# Altium PCB Underwater_ROV_Aux.PcbDoc (part 2 of 2)
Units mm, origin at the board's own origin, x right, y up, seen from the top; angles counter-clockwise.
Board outline 100 x 100 mm, 2 copper layers (Top Layer, Bottom Layer); 61 components, 140 nets, 560 pads, 86 vias.
Unrouted connection lines stored in the file: 2.
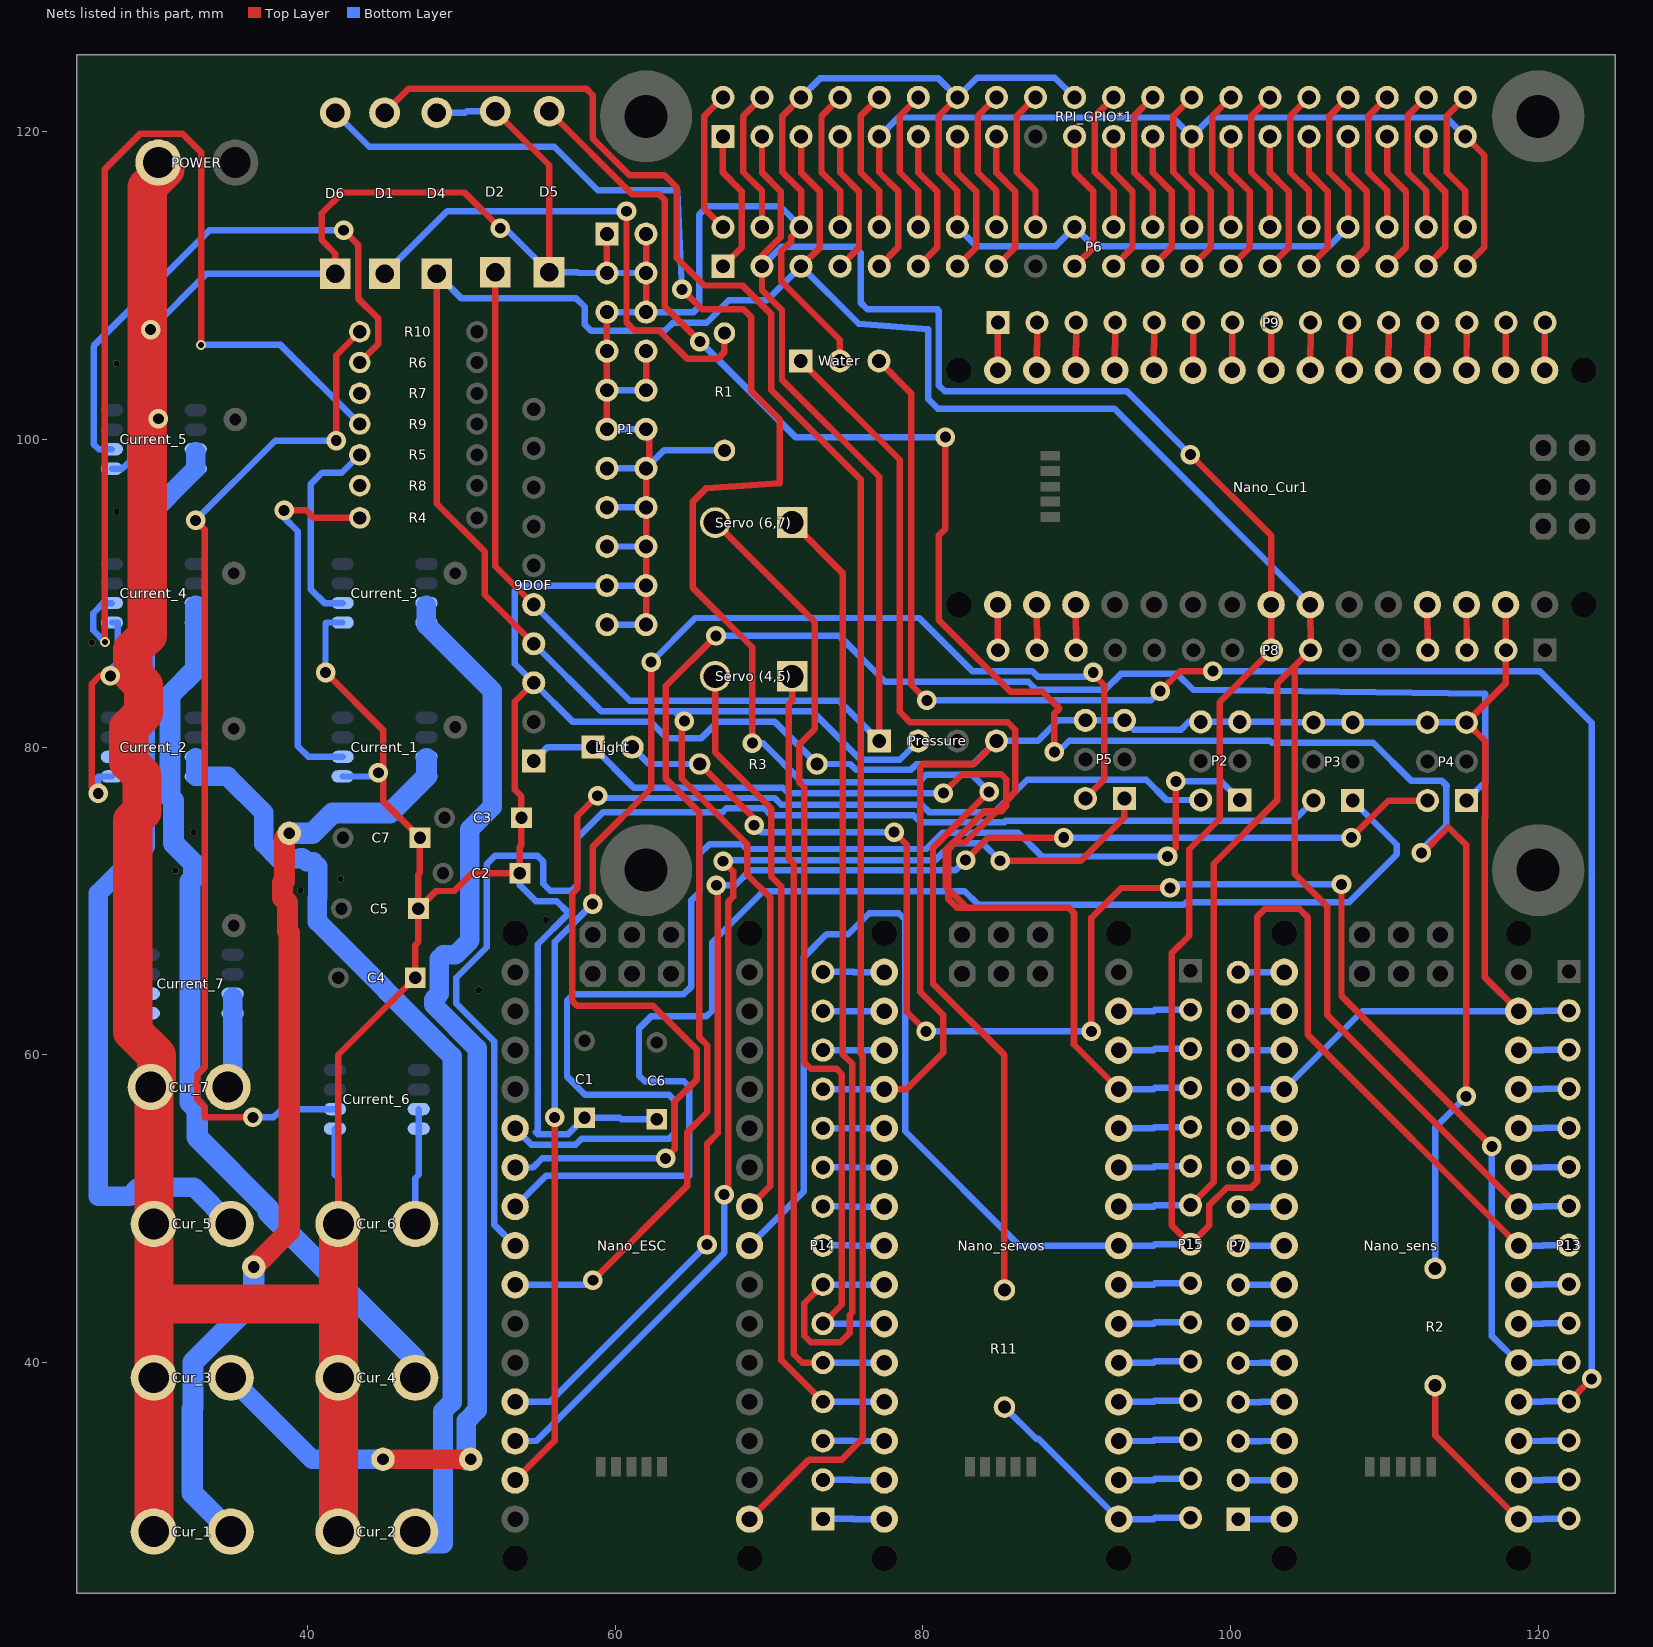
[diagram p2: the nets of this part, all layers, seen from the top]

## Via types
v1: diameter 1.27, hole 0.711, Top Layer to Bottom Layer, 84 vias
v2: diameter 0.635, hole 0.381, Top Layer to Bottom Layer, 2 vias

## Nets (pads, with @x,y where several pads share a name; then routed paths per layer and width w, separated by ;. In a path a pad name is that pad's centre, name@x,y a point inside that pad or via, vN(x,y) a via of type N, cw(c..) or ccw(c..) an arc to the next point about the centre after c; other vN are vias at no path point) (continued)
GND: 9DOF.3 C1.1 C2.1 C3.1 C4.1 C5.1 C6.1 C7.1 Cur_1.- Cur_2.- Cur_3.- Cur_4.- Cur_5.- Cur_6.- Cur_7.- Current_1.5 Current_2.5 Current_3.5 Current_4.5 Current_5.5 Current_6.5 Current_7.5 D2.1 D4.1 D5.2 D6.2 Nano_Cur1.GND. Nano_sens.GND Nano_sens.GND. Nano_servos.GND P1.1 P1.2 P1.3 P1.4 P1.5 P1.6 P1.7 P1.8 P1.9 P1.10 P1.11 P1.12 P1.13 P1.14 P1.15 P1.16 P1.17 P1.18 P1.19 P1.20 P1.21 P1.22 P2.5 P2.6 P3.5 P3.6 P4.5 P4.6 P5.5 P5.6 P6.6 P6.14 P6.20 P6.34 P7.12 P8.2 P13.2 P14.12 POWER.- Pressure.4 R1.2 R3.1 RPI_GPIO*1.6 RPI_GPIO*1.14 RPI_GPIO*1.20 RPI_GPIO*1.34 Water.2 | length 672.7
  Top Layer w0.42: v1(26.391,76.987) 25.964,77.414 25.964,84.105 26.492,84.633 v1(27.178,84.633) 28.633,86.088 29.794,87.249 ; v1(29.794,107.137) 29.794,87.249 ; v1(30.302,101.346) 30.302,87.757 29.794,87.249 ; v1(41.173,84.849) 44.907,81.115 v1@44.907,78.334 ; D6.2@41.8,110.77 41.8,112.078 40.913,112.965 40.913,114.698 42.267,116.053 50.2,116.053 v1(52.524,113.728) ; Cur_6.-@42,49 42,60 C4.1@47,65 47,67.132 47.2,67.332 C5.1@47.2,69.5 ; v1(44.602,78.334) v1@44.907,78.334 ; D2.1@52.2,121.33 55.7,117.83 D5.2@55.7,110.87 ; 9DOF.3@54.7,84.18 53.467,82.947 53.467,77.241 53.9,76.808 C3.1@53.9,75.4 53.9,73.633 53.8,73.533 C2.1@53.8,71.8 50.692,71.8 49.537,70.645 48.345,70.645 C5.1@47.2,69.5 ; P1.11@59.46,100.66 P1.9@59.46,103.2 P1.7@59.46,105.74 P1.5@59.46,108.28 ; P1.3@59.46,110.82 P1.1@59.46,113.36 ; P1.22@62,87.96 P1.20@62,90.5 P1.18@62,93.04 P1.16@62,95.58 P1.14@62,98.12 62.198,98.318 62.198,100.462 P1.12@62,100.66 ; P1.10@62,103.2 P1.8@62,105.74 ; P1.6@62,108.28 P1.4@62,110.82 P1.2@62,113.36 ; RPI_GPIO*1.6@72.08,122.24 70.866,121.026 70.866,117.373 72.08,116.159 P6.6@72.08,113.8 71.45,113.17 71.45,112.89 70.79,112.229 70.79,110.293 74.6,106.482 Water.2@74.6,105.1 ; Nano_servos.GND@77.49,57.75 78.927,57.75 81.312,60.135 81.312,62.594 79.832,64.074 79.832,78.715 80.035,78.918 83.298,78.918 Pressure.4@84.78,80.4 ; P6.14@82.24,113.8 82.24,116.159 81.026,117.373 81.026,121.026 RPI_GPIO*1.14@82.24,122.24 ; P6.34@107.64,113.8 107.64,116.159 106.426,117.373 106.426,121.026 RPI_GPIO*1.34@107.64,122.24 ; Nano_Cur1.GND.@117.88,89.26 117.88,87.777 117.9,87.757 P8.2@117.9,86.3 117.9,84.16 P4.5@115.34,81.6 116.561,80.379 116.561,75.463 116.535,75.438 116.535,65.025 Nano_sens.GND.@118.73,62.83 ; v1@44.907,78.334 44.907,76.493 C7.1@47.3,74.1 47.3,71.83 47.2,71.73 C5.1@47.2,69.5
  Top Layer w2.54: Cur_1.-@30,29 Cur_3.-@30,39 30,44 ; POWER.-@30.3,118 30.739,117.561 29.572,116.395 29.572,87.267 28.633,86.328 28.633,86.088 28.633,84.707 29.337,84.003 29.337,82.215 28.372,81.25 28.372,79.012 29.224,78.161 29.224,75.814 28.633,75.223 28.633,61.498 30.168,59.962 30.168,58.268 Cur_7.-@29.8,57.9 30,57.7 Cur_5.-@30,49 30,44 ; Cur_2.-@42,29 Cur_4.-@42,39 42,43.8 ; Cur_6.-@42,49 42,43.8 ; 30,44 30.2,43.8 42,43.8
  Bottom Layer w0.4: v1(26.391,76.987) 26.391,78.07 26.416,78.095 Current_2.5@27.275,78.095 ; Current_4.5@27.275,88.095 27.661,88.095 27.661,85.522 27.661,85.115 ; Current_5.5@27.275,98.095 27.94,98.095 28.473,98.628 ; v1(41.173,84.849) 41.173,88.07 41.199,88.095 Current_3.5@42.275,88.095 ; Current_1.5@42.275,78.095 v1@44.364,78.095
  Bottom Layer w0.42: 27.661,85.115 v1(27.178,84.633) 27.178,85.039 27.661,85.522 ; 28.473,98.628 28.473,99.949 29.87,101.346 v1(30.302,101.346) ; Current_7.5@29.675,62.695 29.675,60.348 29.8,60.223 Cur_7.-@29.8,57.9 ; v1(29.794,107.137) 33.427,110.77 D6.2@41.8,110.77 ; Current_6.5@41.775,55.195 41.775,52.193 42,51.968 Cur_6.-@42,49 ; v1@44.364,78.095 v1(44.602,78.334) ; D4.1@48.4,121.23 50.241,121.23 50.341,121.33 D2.1@52.2,121.33 ; v1(52.524,113.728) 52.841,113.728 D5.2@55.7,110.87 57.531,110.87 57.581,110.82 P1.3@59.46,110.82 P1.4@62,110.82 ; C2.1@53.8,71.8 53.8,71.018 54.843,69.975 56.192,69.975 56.891,69.276 56.891,69.122 54.959,67.19 54.959,55.07 54.843,54.954 54.966,54.832 56.932,54.832 C1.1@58,55.9 60.3,55.9 60.4,55.8 C6.1@62.7,55.8 ; P1.21@59.46,87.96 P1.22@62,87.96 ; P1.17@59.46,93.04 P1.18@62,93.04 ; P1.15@59.46,95.58 P1.16@62,95.58 ; P1.13@59.46,98.12 P1.14@62,98.12 63.17,99.29 R1.2@67.1,99.29 ; P1.11@59.46,100.66 P1.12@62,100.66 ; P1.9@59.46,103.2 P1.10@62,103.2 ; P1.5@59.46,108.28 P1.6@62,108.28 65.087,108.28 65.456,108.648 65.456,114.617 66.002,115.164 70.716,115.164 P6.6@72.08,113.8 ; P1.20@62,90.5 P1.19@59.46,90.5 53.797,90.5 53.467,90.17 53.467,85.413 9DOF.3@54.7,84.18 57.219,81.661 62.28,81.661 63.379,80.562 65.577,80.562 66.676,81.661 70.349,81.661 R3.1@73.11,78.9 75.272,78.9 75.66,78.512 79.195,78.512 79.558,78.875 83.255,78.875 Pressure.4@84.78,80.4 87.461,80.4 88.801,81.74 P5.6@90.56,81.74 P5.5@93.1,81.74 93.707,81.133 96.782,81.133 97.29,81.64 P2.6@98.06,81.64 P2.5@100.6,81.64 102.972,81.64 103.012,81.6 P3.6@105.4,81.6 P3.5@107.94,81.6 P4.6@112.8,81.6 P4.5@115.34,81.6 ; RPI_GPIO*1.6@72.08,122.24 73.309,123.469 81.011,123.469 RPI_GPIO*1.14@82.24,122.24 83.52,123.52 88.58,123.52 RPI_GPIO*1.20@89.86,122.24 ; P14.12@73.5,57.76 75.489,57.76 75.499,57.75 Nano_servos.GND@77.49,57.75 ; P6.14@82.24,113.8 83.467,112.573 88.633,112.573 P6.20@89.86,113.8 91.087,112.573 106.413,112.573 P6.34@107.64,113.8 ; P7.12@100.5,57.74 101.981,57.74 101.991,57.75 Nano_sens.GND@103.49,57.75 108.57,62.83 Nano_sens.GND.@118.73,62.83 120.345,62.83 120.375,62.86 P13.2@122,62.86
NetCur_1_+: Cur_1.+ Current_1.3 Current_1.4 pad.42 pad.43 | length 61.1
  Top Layer w1.38: pad.43@36.5,46.2 38.8,48.5 38.8,67.915 38.692,68.023 38.692,69.88 38.366,70.206 38.366,71.174 38.492,71.3 38.492,74.092 pad.42@38.8,74.4
  Bottom Layer w0.42: Current_1.3@47.725,79.256 Current_1.3@47.725,79.365
  Bottom Layer w1.38: Cur_1.+@35,29 32.5,31.5 32.5,37 32.556,37.056 32.556,40.012 36.5,43.956 pad.43@36.5,46.2 ; pad.42@38.8,74.4 40.31,74.4 41.629,75.719 45.349,75.719 Current_1.4@47.725,78.095 Current_1.3@47.725,79.256
NetCur_2_+: Cur_2.+ Current_2.3 Current_2.4 | length 62.9
  Bottom Layer w0.42: Current_2.3@32.725,79.311 Current_2.3@32.725,79.365
  Bottom Layer w1.27: Current_2.3@32.725,79.311 Current_2.4@32.725,78.095 34.796,78.095 37.149,75.742 37.149,73.716 38.116,72.749 39.484,72.749 39.556,72.821 39.656,72.821 39.942,72.535 40.356,72.535 40.649,72.242 40.649,70.228 40.636,70.215 40.636,68.647 49.389,59.894 49.389,37.421 48.8,36.832 48.8,28.2 47.8,28.2 Cur_2.+@47,29
NetCur_3_+: Cur_3.+ Current_3.3 Current_3.4 pad.40 pad.41 | length 79.2
  Top Layer w1.27: pad.41@44.9,33.7 pad.40@50.6,33.7
  Bottom Layer w0.42: Current_3.3@47.725,89.211 Current_3.3@47.725,89.365 ; pad.40@50.324,33.6 50.412,33.512 pad.40@50.6,33.7
  Bottom Layer w1.27: Cur_3.+@35,39 40.3,33.7 pad.41@44.9,33.7 ; Current_3.3@47.725,89.211 Current_3.4@47.725,88.095 47.725,87.932 51.989,83.668 51.989,76.113 50.543,74.667 50.543,67.437 49.602,66.497 48.829,66.497 48.564,66.232 48.564,63.957 48.188,63.581 48.188,63.25 51.022,60.417 51.022,36.899 50.324,36.201 pad.40@50.324,33.6
NetCur_4_+: Cur_4.+ Current_4.3 Current_4.4 | length 57.9
  Bottom Layer w0.42: Current_4.3@32.725,89.156 Current_4.3@32.725,89.365
  Bottom Layer w1.38: Current_4.3@32.725,89.156 Current_4.4@32.725,88.095 32.725,85.06 31.056,83.391 31.056,76.751 31.286,76.521 31.286,73.753 32.588,72.451 32.588,71.483 32.356,71.251 32.356,56.888 32.825,56.419 32.825,54.631 37.444,50.012 37.444,49.756 47,40.2 Cur_4.+@47,39
NetCur_5_+: Cur_5.+ Current_5.3 Current_5.4 | length 61.1
  Bottom Layer w0.42: Current_5.3@32.725,99.211 Current_5.3@32.725,99.365
  Bottom Layer w1.27: Current_5.3@32.725,99.211 Current_5.4@32.725,98.095 29.37,94.74 29.448,94.662 29.448,73.557 29.37,73.479 26.389,70.498 26.389,50.8 28.421,50.8 29.01,51.389 32.611,51.389 Cur_5.+@35,49
NetCur_6_+: Cur_6.+ Current_6.3 Current_6.4 | length 7.6
  Bottom Layer w0.42: Cur_6.+@47,49 47,51.968 47.225,52.193 Current_6.4@47.225,55.195 Current_6.3@47.225,56.465
NetCur_7_+: Cur_7.+ Current_7.3 Current_7.4 | length 6.2
  Bottom Layer w0.42: Current_7.3@35.125,63.741 Current_7.3@35.125,63.965
  Bottom Layer w1.27: Cur_7.+@34.8,57.9 35.125,58.225 Current_7.4@35.125,62.695 Current_7.3@35.125,63.741
NetCurrent_1_6: Current_1.6 R4.2 | length 24
  Top Layer w0.42: v1(38.469,95.388) 39.916,95.388 40.404,94.9 R4.2@43.39,94.9
  Bottom Layer w0.42: v1(38.469,95.388) 38.469,94.922 39.364,94.027 39.364,80.054 40.053,79.365 Current_1.6@42.275,79.365
NetCurrent_2_6: Current_2.6 R8.2
NetCurrent_3_6: Current_3.6 R5.2 | length 13.3
  Bottom Layer w0.42: Current_3.6@42.275,89.365 41.097,89.365 40.192,90.27 40.192,97.087 40.936,97.832 42.222,97.832 R5.2@43.39,99
NetCurrent_4_6: Current_4.6 R9.2 | length 67.1
  Top Layer w0.42: v2(26.822,86.826) 26.822,117.577 29.134,119.888 31.852,119.888 33.071,118.669 v2(33.071,106.147)
  Bottom Layer w0.42: v2(26.822,86.826) 26.06,87.588 26.06,88.705 26.721,89.365 Current_4.6@27.275,89.365 ; v2(33.071,106.147) 38.243,106.147 R9.2@43.39,101
NetCurrent_5_6: Current_5.6 R6.2 | length 37.1
  Top Layer w0.42: v1(42.345,113.602) 43.282,112.665 43.282,109.169 44.577,107.874 44.577,106.187 R6.2@43.39,105
  Bottom Layer w0.42: Current_5.6@27.275,99.365 26.416,99.365 26.086,99.695 26.086,106.07 33.617,113.602 v1(42.345,113.602)
NetCurrent_6_6: Current_6.6 R10.2 | length 67.1
  Top Layer w0.42: v1(32.715,94.742) 33.299,94.158 33.299,59.177 32.836,58.714 32.836,57.087 33.299,56.623 33.299,55.931 v1(36.436,55.931) ; v1(41.859,99.924) 41.859,105.469 R10.2@43.39,107
  Bottom Layer w0.42: v1(32.715,94.742) 37.897,99.924 v1(41.859,99.924) ; v1(36.436,55.931) 37.786,55.931 38.32,56.465 Current_6.6@41.775,56.465
NetCurrent_7_6: Current_7.6 R7.2
NetD1_1: D1.1 Nano_ESC.D13 | length 121.3
  Top Layer w0.42: D1.1@45,121.23 46.579,122.809 58.102,122.809 58.536,122.376 58.536,119.565 60.931,117.17 63.195,117.17 64.008,116.357 64.008,111.785 65.786,110.007 68.275,110.007 70.155,108.128 70.155,103.2 75.946,97.409 75.946,60.086 76.075,59.957 76.075,35.028 74.727,33.68 72.6,33.68 Nano_ESC.D13@68.73,29.81
NetD1_2: D1.2 R1.1 | length 33.4
  Top Layer w0.42: v1(60.731,114.833) 60.731,107.607 61.277,107.061 62.865,107.061 64.668,105.258 66.675,105.258 67.1,105.683 R1.1@67.1,106.91
  Bottom Layer w0.42: D1.2@45,110.77 49.063,114.833 v1(60.731,114.833)
NetD5_1: D5.1 R2.1 | length 128.4
  Top Layer w0.42: D5.1@55.7,121.33 61.104,115.926 62.865,115.926 63.221,115.57 63.221,108.648 v1(65.507,106.362) ; v1(81.465,100.152) 81.465,94.189 81.03,93.755 81.03,88.261 85.703,83.588 87.799,83.588 88.875,82.513 88.544,82.182 v1(88.544,79.688) ; v1(112.405,73.119) 112.49,73.119 114.161,74.79 115.316,73.635 v1(115.316,57.29)
  Bottom Layer w0.42: v1(65.507,106.362) 71.717,100.152 v1(81.465,100.152) ; v1(88.544,79.688) 88.781,79.688 89.51,80.416 102.565,80.416 102.692,80.289 109.271,80.289 111.76,77.8 113.741,77.8 114.071,77.47 114.014,77.413 114.014,74.921 112.405,73.312 v1(112.405,73.119) ; R2.1@113.3,46.11 113.3,55.274 v1(115.316,57.29)
NetD6_1: D6.1 R11.1 | length 123.8
  Top Layer w0.42: v1(64.338,109.753) 65.617,108.475 68.329,108.475 68.854,107.95 68.854,103.129 70.688,101.295 70.688,97.155 65.926,96.837 65.024,95.936 65.024,90.373 68.91,86.487 v1(68.91,80.252) ; v1(84.303,77.089) 80.656,73.443 80.656,64.622 85.3,59.978 R11.1@85.3,44.71
  Bottom Layer w0.42: D6.1@41.8,121.23 44.006,119.024 56.04,119.024 58.859,116.205 64.021,116.205 v1(64.338,109.753) ; v1(68.91,80.252) 69.617,80.252 72.146,77.724 79.749,77.724 80.226,78.201 83.191,78.201 v1(84.303,77.089)
NetLight_2: Light.2 Nano_sens.A1 P13.11 R3.2 | length 107.8
  Top Layer w0.42: R3.2@65.49,78.9 69.025,75.366 v1(69.025,74.917) ; v1(78.13,74.473) 78.943,73.66 78.943,62.789 v1(80.213,61.519) ; v1(90.957,61.519) 90.957,68.897 92.9,70.841 v1(96.063,70.841) ; v1(107.213,71.069) 107.213,63.817 v1(116.992,54.038)
  Bottom Layer w0.42: Light.2@61.1,80 62.2,78.9 R3.2@65.49,78.9 ; v1(69.025,74.917) 69.469,74.473 v1(78.13,74.473) ; v1(80.213,61.519) v1(90.957,61.519) ; v1(96.063,70.841) 96.291,71.069 v1(107.213,71.069) ; v1(116.992,54.038) 116.992,41.708 Nano_sens.A1@118.73,39.97 120.345,39.97 120.375,40 P13.11@122,40
NetNano_Cur1_3V3: Nano_Cur1.3V3 P8.14 | length 3
  Top Layer w0.42: Nano_Cur1.3V3@87.4,89.26 87.4,87.777 87.42,87.757 P8.14@87.42,86.3
NetNano_Cur1_5V: Nano_Cur1.5V P8.4 | length 3
  Top Layer w0.42: Nano_Cur1.5V@112.8,89.26 112.8,87.777 112.82,87.757 P8.4@112.82,86.3
NetNano_Cur1_D2: Nano_Cur1.D2 P9.11 | length 3.1
  Top Layer w0.42: Nano_Cur1.D2@110.26,104.5 110.26,106.02 110.28,106.04 P9.11@110.28,107.6
NetNano_Cur1_D3: Nano_Cur1.D3 P9.10 | length 3.1
  Top Layer w0.42: Nano_Cur1.D3@107.72,104.5 107.72,106.02 107.74,106.04 P9.10@107.74,107.6
NetNano_Cur1_D4: Nano_Cur1.D4 P9.9 | length 3.1
  Top Layer w0.42: Nano_Cur1.D4@105.18,104.5 105.18,106.02 105.2,106.04 P9.9@105.2,107.6
NetNano_Cur1_D5: Nano_Cur1.D5 P9.8 | length 3.1
  Top Layer w0.42: Nano_Cur1.D5@102.64,104.5 102.64,106.02 102.66,106.04 P9.8@102.66,107.6
NetNano_Cur1_D6: Nano_Cur1.D6 P9.7 | length 3.1
  Top Layer w0.42: Nano_Cur1.D6@100.1,104.5 100.1,106.02 100.12,106.04 P9.7@100.12,107.6
NetNano_Cur1_D7: Nano_Cur1.D7 P9.6 | length 3.1
  Top Layer w0.42: Nano_Cur1.D7@97.56,104.5 97.56,106.02 97.58,106.04 P9.6@97.58,107.6
NetNano_Cur1_D8: Nano_Cur1.D8 P9.5 | length 3.1
  Top Layer w0.42: Nano_Cur1.D8@95.02,104.5 95.02,106.02 95.04,106.04 P9.5@95.04,107.6
NetNano_Cur1_D9: Nano_Cur1.D9 P9.4 | length 3.1
  Top Layer w0.42: Nano_Cur1.D9@92.48,104.5 92.48,106.02 92.5,106.04 P9.4@92.5,107.6
NetNano_Cur1_D10: Nano_Cur1.D10 P9.3 | length 3.1
  Top Layer w0.42: Nano_Cur1.D10@89.94,104.5 89.94,106.02 89.96,106.04 P9.3@89.96,107.6
NetNano_Cur1_D11: Nano_Cur1.D11 P9.2 | length 3.1
  Top Layer w0.42: Nano_Cur1.D11@87.4,104.5 87.4,106.02 87.42,106.04 P9.2@87.42,107.6
NetNano_Cur1_D12: Nano_Cur1.D12 P9.1 | length 3.1
  Top Layer w0.42: Nano_Cur1.D12@84.86,104.5 84.86,106.02 84.88,106.04 P9.1@84.88,107.6
NetNano_Cur1_D13: Nano_Cur1.D13 P8.15 | length 3
  Top Layer w0.42: Nano_Cur1.D13@84.86,89.26 84.86,87.777 84.88,87.757 P8.15@84.88,86.3
NetNano_Cur1_GND: Nano_Cur1.GND P9.12 | length 3.1
  Top Layer w0.42: Nano_Cur1.GND@112.8,104.5 112.8,106.02 112.82,106.04 P9.12@112.82,107.6
NetNano_Cur1_REF: Nano_Cur1.REF P8.13 | length 3
  Top Layer w0.42: Nano_Cur1.REF@89.94,89.26 89.94,87.777 89.96,87.757 P8.13@89.96,86.3
NetNano_Cur1_RST: Nano_Cur1.RST P9.13 | length 3.1
  Top Layer w0.42: Nano_Cur1.RST@115.34,104.5 115.34,106.02 115.36,106.04 P9.13@115.36,107.6
NetNano_Cur1_RST.: Nano_Cur1.RST. P8.3 | length 3
  Top Layer w0.42: Nano_Cur1.RST.@115.34,89.26 115.34,87.777 115.36,87.757 P8.3@115.36,86.3
NetNano_Cur1_RX1: Nano_Cur1.RX1 P9.14 | length 3.1
  Top Layer w0.42: Nano_Cur1.RX1@117.88,104.5 117.88,106.02 117.9,106.04 P9.14@117.9,107.6
NetNano_Cur1_TX1: Nano_Cur1.TX1 P9.15 | length 3.1
  Top Layer w0.42: Nano_Cur1.TX1@120.42,104.5 120.42,106.02 120.44,106.04 P9.15@120.44,107.6
NetNano_ESC_D2: Nano_ESC.D2 P2.1 | length 84.8
  Top Layer w0.42: v1(95.901,72.888) 96.444,73.431 v1(96.444,77.775)
  Bottom Layer w0.42: Nano_ESC.D2@53.49,55.21 54.542,54.158 57.432,54.158 57.808,54.534 63.5,54.534 63.856,54.889 63.856,57.048 63.5,57.404 58.039,57.404 56.861,58.582 56.861,63.5 57.305,63.944 64.453,63.944 64.949,64.441 64.949,70.051 65.464,70.565 65.464,73.025 66.131,73.692 68.243,73.692 68.561,73.374 80.218,73.374 81.274,74.43 86.196,74.43 87.737,72.888 v1(95.901,72.888) ; v1(96.444,77.775) 99.385,77.775 P2.1@100.6,76.56
NetNano_ESC_D3: Nano_ESC.D3 P2.2 | length 82.4
  Top Layer w0.42: v1(58.852,76.835) 57.531,75.514 57.531,70.79 57.201,70.46 57.201,63.5 57.518,63.182 62.458,63.182 65.31,60.33 65.31,58.39 63.856,56.935 63.856,53.848 v1(63.271,53.264)
  Bottom Layer w0.42: Nano_ESC.D3@53.49,52.67 54.651,52.67 55.245,53.264 v1(63.271,53.264) ; v1(58.852,76.835) 58.996,76.69 70.36,76.69 70.798,76.253 79.914,76.253 80.389,75.778 84.693,75.778 86.792,77.876 94.513,77.876 95.83,76.56 P2.2@98.06,76.56
NetNano_ESC_D4: Nano_ESC.D4 P3.1 | length 86.5
  Bottom Layer w0.42: Nano_ESC.D4@53.49,50.13 55.506,52.146 64.795,52.146 64.821,52.172 64.821,57.899 64.453,58.268 61.912,58.268 61.544,58.636 61.544,61.709 62.323,62.488 65.92,62.488 66.297,62.865 66.297,67.313 69.616,70.632 82.728,70.632 83.619,69.741 96.966,69.741 97.15,69.926 107.716,69.926 110.807,73.017 110.807,73.652 P3.1@107.94,76.52
NetNano_ESC_D5: Nano_ESC.D5 P3.2 | length 88
  Bottom Layer w0.42: Nano_ESC.D5@53.49,47.59 52.121,48.959 52.121,60.872 49.663,63.33 49.663,65.004 51.642,66.982 51.642,72.394 52.197,72.949 54.927,72.949 55.314,72.562 55.314,71.12 55.777,70.657 57.15,70.657 57.531,71.038 57.531,74.095 59.203,75.768 66.973,75.768 67.221,76.016 69.686,76.016 70.124,75.579 79.381,75.579 79.856,75.104 85.278,75.104 85.397,75.223 104.103,75.223 P3.2@105.4,76.52
NetNano_ESC_D6: Nano_ESC.D6 P4.1 | length 112.4
  Top Layer w0.42: v1(58.547,45.339) 64.668,51.46 64.668,54.945 65.984,56.261 65.984,60.609 65.474,61.119 65.474,75.75 63.271,77.953 63.271,83.947 v1(66.548,87.224)
  Bottom Layer w0.42: Nano_ESC.D6@53.49,45.05 58.258,45.05 v1(58.547,45.339) ; v1(66.548,87.224) 74.574,87.224 77.546,84.252 86.843,84.252 87.376,83.718 91.832,83.718 92.871,84.758 96.534,84.758 97.573,83.718 116.561,83.464 116.561,77.741 P4.1@115.34,76.52
NetNano_ESC_D9: Nano_ESC.D9 P4.2 | length 88.9
  Top Layer w0.42: v1(65.964,47.65) 65.964,54.204 66.66,54.9 66.66,70.932 v1(66.573,71.018) ; v1(82.779,72.657) 84.239,74.117 v1(89.154,74.117) ; v1(107.848,74.117) 110.251,76.52 P4.2@112.8,76.52
  Bottom Layer w0.42: Nano_ESC.D9@53.49,37.43 55.743,37.43 v1(65.964,47.65) ; v1(66.573,71.018) 67.793,71.018 68.755,71.98 82.102,71.98 v1(82.779,72.657) ; v1(89.154,74.117) v1(107.848,74.117)
NetNano_ESC_D10: Nano_ESC.D10 P5.1 | length 74.1
  Top Layer w0.42: v1(67.018,72.578) 67.679,71.917 67.679,70.27 67.335,69.926 67.335,51.156 v1(67.081,50.902) ; v1(85.024,72.609) 90.274,72.609 93.1,75.435 P5.1@93.1,76.66
  Bottom Layer w0.42: Nano_ESC.D10@53.49,34.89 54.854,34.89 67.081,47.117 v1(67.081,50.902) ; v1(67.018,72.578) 67.094,72.654 80.814,72.654 81.915,73.756 83.878,73.756 v1(85.024,72.609)
NetNano_ESC_D11: Nano_ESC.D11 P5.2 | length 97.5
  Top Layer w0.42: Nano_ESC.D11@53.49,32.35 56.058,34.918 v1(56.058,55.931) ; v1(58.522,69.799) 58.522,73.508 62.332,77.318 v1(62.332,85.522) ; P5.2@90.56,76.66 91.796,77.896 91.796,84.023 91.074,84.745 v1(91.074,84.857)
  Bottom Layer w0.42: v1(56.058,55.931) 56.058,67.335 v1(58.522,69.799) ; v1(62.332,85.522) 65.202,88.392 79.759,88.392 83.225,84.926 87.122,84.926 87.461,84.587 90.531,84.587 90.801,84.857 v1(91.074,84.857)
NetNano_sens_3V3: Nano_sens.3V3 P13.14 | length 3.3
  Bottom Layer w0.42: Nano_sens.3V3@118.73,32.35 120.345,32.35 120.375,32.38 P13.14@122,32.38
NetNano_sens_5V: Nano_sens.5V P13.4 | length 3.3
  Bottom Layer w0.42: Nano_sens.5V@118.73,57.75 120.345,57.75 120.375,57.78 P13.4@122,57.78
NetNano_sens_A0: Nano_sens.A0 P13.12 Water.3 | length 116.8
  Top Layer w0.42: Water.3@77.14,105.1 79.248,102.992 79.248,84.049 v1(80.264,83.033) ; v1(95.428,83.642) 96.723,84.938 v1(98.857,84.938) ; P13.12@122,37.46 v1(123.469,38.929)
  Bottom Layer w0.42: v1(80.264,83.033) 94.818,83.033 v1(95.428,83.642) ; v1(98.857,84.938) 120.117,84.938 123.469,81.585 v1(123.469,38.929) ; Nano_sens.A0@118.73,37.43 120.345,37.43 120.375,37.46 P13.12@122,37.46
NetNano_sens_A2: Nano_sens.A2 P13.10 | length 3.3
  Bottom Layer w0.42: Nano_sens.A2@118.73,42.51 120.345,42.51 120.375,42.54 P13.10@122,42.54
NetNano_sens_A3: Nano_sens.A3 P13.9 | length 3.3
  Bottom Layer w0.42: Nano_sens.A3@118.73,45.05 120.345,45.05 120.375,45.08 P13.9@122,45.08
NetNano_sens_A6: Nano_sens.A6 P13.6 | length 3.3
  Bottom Layer w0.42: Nano_sens.A6@118.73,52.67 120.345,52.67 120.375,52.7 P13.6@122,52.7
NetNano_sens_A7: Nano_sens.A7 P13.5 | length 3.3
  Bottom Layer w0.42: Nano_sens.A7@118.73,55.21 120.345,55.21 120.375,55.24 P13.5@122,55.24
NetNano_sens_D2: Nano_sens.D2 P7.11 | length 3
  Bottom Layer w0.42: P7.11@100.5,55.2 101.981,55.2 101.991,55.21 Nano_sens.D2@103.49,55.21
NetNano_sens_D3: Nano_sens.D3 P7.10 | length 3
  Bottom Layer w0.42: P7.10@100.5,52.66 101.981,52.66 101.991,52.67 Nano_sens.D3@103.49,52.67
NetNano_sens_D4: Nano_sens.D4 P7.9 | length 3
  Bottom Layer w0.42: P7.9@100.5,50.12 101.981,50.12 101.991,50.13 Nano_sens.D4@103.49,50.13
NetNano_sens_D5: Nano_sens.D5 P7.8 | length 3
  Bottom Layer w0.42: P7.8@100.5,47.58 101.981,47.58 101.991,47.59 Nano_sens.D5@103.49,47.59
NetNano_sens_D6: Nano_sens.D6 P7.7 | length 3
  Bottom Layer w0.42: P7.7@100.5,45.04 101.981,45.04 101.991,45.05 Nano_sens.D6@103.49,45.05
NetNano_sens_D7: Nano_sens.D7 P7.6 | length 3
  Bottom Layer w0.42: P7.6@100.5,42.5 101.981,42.5 101.991,42.51 Nano_sens.D7@103.49,42.51
NetNano_sens_D8: Nano_sens.D8 P7.5 | length 3
  Bottom Layer w0.42: P7.5@100.5,39.96 101.981,39.96 101.991,39.97 Nano_sens.D8@103.49,39.97
NetNano_sens_D9: Nano_sens.D9 P7.4 | length 3
  Bottom Layer w0.42: P7.4@100.5,37.42 101.981,37.42 101.991,37.43 Nano_sens.D9@103.49,37.43
NetNano_sens_D10: Nano_sens.D10 P7.3 | length 3
  Bottom Layer w0.42: P7.3@100.5,34.88 101.981,34.88 101.991,34.89 Nano_sens.D10@103.49,34.89
NetNano_sens_D11: Nano_sens.D11 P7.2 | length 3
  Bottom Layer w0.42: P7.2@100.5,32.34 101.981,32.34 101.991,32.35 Nano_sens.D11@103.49,32.35
NetNano_sens_D12: Nano_sens.D12 P7.1 | length 3
  Bottom Layer w0.42: P7.1@100.5,29.8 101.981,29.8 101.991,29.81 Nano_sens.D12@103.49,29.81
NetNano_sens_D13: Nano_sens.D13 P13.15 R2.2 | length 14.2
  Top Layer w0.42: R2.2@113.3,38.49 113.3,35.24 Nano_sens.D13@118.73,29.81
  Bottom Layer w0.42: Nano_sens.D13@118.73,29.81 120.345,29.81 120.375,29.84 P13.15@122,29.84
NetNano_sens_REF: Nano_sens.REF P13.13 | length 3.3
  Bottom Layer w0.42: Nano_sens.REF@118.73,34.89 120.345,34.89 120.375,34.92 P13.13@122,34.92
NetNano_sens_RST: Nano_sens.RST P7.13 | length 3
  Bottom Layer w0.42: P7.13@100.5,60.28 101.981,60.28 101.991,60.29 Nano_sens.RST@103.49,60.29
NetNano_sens_RST.: Nano_sens.RST. P13.3 | length 3.3
  Bottom Layer w0.42: Nano_sens.RST.@118.73,60.29 120.345,60.29 120.375,60.32 P13.3@122,60.32
NetNano_sens_RX1: Nano_sens.RX1 P7.14 | length 3
  Bottom Layer w0.42: P7.14@100.5,62.82 101.981,62.82 101.991,62.83 Nano_sens.RX1@103.49,62.83
NetNano_sens_TX1: Nano_sens.TX1 P7.15 | length 3
  Bottom Layer w0.42: P7.15@100.5,65.36 101.981,65.36 101.991,65.37 Nano_sens.TX1@103.49,65.37
NetNano_servos_3V3: Nano_servos.3V3 P15.14 | length 4.7
  Bottom Layer w0.42: Nano_servos.3V3@92.73,32.35 94.996,32.35 95.086,32.44 P15.14@97.4,32.44
NetNano_servos_A0: Nano_servos.A0 P15.12 | length 4.7
  Bottom Layer w0.42: Nano_servos.A0@92.73,37.43 94.996,37.43 95.086,37.52 P15.12@97.4,37.52
NetNano_servos_A1: Nano_servos.A1 P15.11 | length 4.7
  Bottom Layer w0.42: Nano_servos.A1@92.73,39.97 94.996,39.97 95.086,40.06 P15.11@97.4,40.06
NetNano_servos_A2: Nano_servos.A2 P15.10 | length 4.7
  Bottom Layer w0.42: Nano_servos.A2@92.73,42.51 94.996,42.51 95.086,42.6 P15.10@97.4,42.6
NetNano_servos_A3: Nano_servos.A3 P15.9 | length 4.7
  Bottom Layer w0.42: Nano_servos.A3@92.73,45.05 94.996,45.05 95.086,45.14 P15.9@97.4,45.14
NetNano_servos_A6: Nano_servos.A6 P15.6 | length 4.7
  Bottom Layer w0.42: Nano_servos.A6@92.73,52.67 94.996,52.67 95.086,52.76 P15.6@97.4,52.76
NetNano_servos_A7: Nano_servos.A7 P15.5 | length 4.7
  Bottom Layer w0.42: Nano_servos.A7@92.73,55.21 94.996,55.21 95.086,55.3 P15.5@97.4,55.3
NetNano_servos_D2: Nano_servos.D2 P14.11 | length 4
  Bottom Layer w0.42: P14.11@73.5,55.22 75.489,55.22 75.499,55.21 Nano_servos.D2@77.49,55.21
NetNano_servos_D3: Nano_servos.D3 P14.10 | length 4
  Bottom Layer w0.42: P14.10@73.5,52.68 75.489,52.68 75.499,52.67 Nano_servos.D3@77.49,52.67
NetNano_servos_D4: Nano_servos.D4 P14.9 | length 4
  Bottom Layer w0.42: P14.9@73.5,50.14 75.489,50.14 75.499,50.13 Nano_servos.D4@77.49,50.13
NetNano_servos_D5: Nano_servos.D5 P14.8 | length 4
  Bottom Layer w0.42: P14.8@73.5,47.6 75.489,47.6 75.499,47.59 Nano_servos.D5@77.49,47.59
NetNano_servos_D6: "Servo (6,7).1" Nano_servos.D6 P14.7 | length 65.6
  Top Layer w0.42: 71.5,94.6 74.778,91.322 74.778,60.034 75.401,59.411 75.401,43.244 75.235,43.078 75.235,41.91 74.625,41.3 72.707,41.3 72.286,41.722 72.286,43.846 P14.7@73.5,45.06
  Bottom Layer w0.42: P14.7@73.5,45.06 75.489,45.06 75.499,45.05 Nano_servos.D6@77.49,45.05
NetNano_servos_D7: "Servo (6,7).2" Nano_servos.D7 P14.6 | length 61.8
  Top Layer w0.42: 66.5,94.6 72.974,88.126 72.974,81.178 71.946,80.15 71.946,77.724 72.286,77.384 72.286,59.502 72.707,59.08 74.384,59.08 74.727,58.737 74.727,43.747 P14.6@73.5,42.52
  Bottom Layer w0.42: P14.6@73.5,42.52 75.489,42.52 75.499,42.51 Nano_servos.D7@77.49,42.51
NetNano_servos_D8: "Servo (4,5).1" Nano_servos.D8 P14.5 | length 50.4
  Top Layer w0.42: 71.5,84.6 71.5,83.006 71.272,82.778 71.272,72.746 71.603,72.415 71.603,40.535 72.158,39.98 P14.5@73.5,39.98
  Bottom Layer w0.42: P14.5@73.5,39.98 75.489,39.98 75.499,39.97 Nano_servos.D8@77.49,39.97
NetNano_servos_D9: "Servo (4,5).2" Nano_servos.D9 P14.4 | length 54.1
  Top Layer w0.42: 66.5,84.6 66.5,79.652 70.129,76.022 70.129,71.603 70.79,70.942 70.79,40.15 P14.4@73.5,37.44
  Bottom Layer w0.42: P14.4@73.5,37.44 75.489,37.44 75.499,37.43 Nano_servos.D9@77.49,37.43
NetNano_servos_D10: Nano_servos.D10 P14.3 | length 4
  Bottom Layer w0.42: P14.3@73.5,34.9 75.489,34.9 75.499,34.89 Nano_servos.D10@77.49,34.89
NetNano_servos_D11: Nano_servos.D11 P14.2 | length 4
  Bottom Layer w0.42: P14.2@73.5,32.36 75.489,32.36 75.499,32.35 Nano_servos.D11@77.49,32.35
NetNano_servos_D12: Nano_servos.D12 P14.1 | length 4
  Bottom Layer w0.42: P14.1@73.5,29.82 75.489,29.82 75.499,29.81 Nano_servos.D12@77.49,29.81
NetNano_servos_D13: Nano_servos.D13 P15.15 R11.2 | length 15.2
  Bottom Layer w0.42: R11.2@85.3,37.09 87.363,35.027 87.513,35.027 Nano_servos.D13@92.73,29.81 94.996,29.81 95.086,29.9 P15.15@97.4,29.9
NetNano_servos_GND.: Nano_servos.GND. P15.2 | length 4.7
  Bottom Layer w0.42: Nano_servos.GND.@92.73,62.83 94.996,62.83 95.086,62.92 P15.2@97.4,62.92
NetNano_servos_REF: Nano_servos.REF P15.13 | length 4.7
  Bottom Layer w0.42: Nano_servos.REF@92.73,34.89 94.996,34.89 95.086,34.98 P15.13@97.4,34.98
NetNano_servos_RST: Nano_servos.RST P14.13 | length 4
  Bottom Layer w0.42: P14.13@73.5,60.3 75.489,60.3 75.499,60.29 Nano_servos.RST@77.49,60.29
NetNano_servos_RST.: Nano_servos.RST. P15.3 | length 4.7
  Bottom Layer w0.42: Nano_servos.RST.@92.73,60.29 94.996,60.29 95.086,60.38 P15.3@97.4,60.38
NetNano_servos_RX1: Nano_servos.RX1 P14.14 | length 4
  Bottom Layer w0.42: P14.14@73.5,62.84 75.489,62.84 75.499,62.83 Nano_servos.RX1@77.49,62.83
NetNano_servos_TX1: Nano_servos.TX1 P14.15 | length 4
  Bottom Layer w0.42: P14.15@73.5,65.38 75.489,65.38 75.499,65.37 Nano_servos.TX1@77.49,65.37
NetP6_1: P6.1 RPI_GPIO*1.1 | length 9.5
  Top Layer w0.42: P6.1@67,111.26 68.224,112.484 68.224,116.124 67,117.348 RPI_GPIO*1.1@67,119.7
NetP6_2: P6.2 RPI_GPIO*1.2 | length 9.4
  Top Layer w0.42: P6.2@67,113.8 65.786,115.014 65.786,121.026 RPI_GPIO*1.2@67,122.24
NetP6_4: P6.4 RPI_GPIO*1.4 | length 9.4
  Top Layer w0.42: P6.4@69.54,113.8 69.54,116.159 68.326,117.373 68.326,121.026 RPI_GPIO*1.4@69.54,122.24
NetP6_7: P6.7 RPI_GPIO*1.7 | length 9.5
  Top Layer w0.42: P6.7@74.62,111.26 75.844,112.484 75.844,116.124 74.62,117.348 RPI_GPIO*1.7@74.62,119.7
NetP6_8: P6.8 RPI_GPIO*1.8 | length 9.4
  Top Layer w0.42: P6.8@74.62,113.8 74.62,116.159 73.406,117.373 73.406,121.026 RPI_GPIO*1.8@74.62,122.24
NetP6_9: P6.9 P6.25 P6.39 RPI_GPIO*1.9 RPI_GPIO*1.25 RPI_GPIO*1.39 | length 68.5
  Top Layer w0.42: P6.9@77.16,111.26 78.384,112.484 78.384,116.154 77.16,117.379 RPI_GPIO*1.9@77.16,119.7 ; P6.25@97.48,111.26 98.704,112.484 98.704,116.154 97.48,117.379 RPI_GPIO*1.25@97.48,119.7 ; P6.39@115.26,111.26 116.484,112.484 116.484,118.476 RPI_GPIO*1.39@115.26,119.7
  Bottom Layer w0.42: RPI_GPIO*1.9@77.16,119.7 78.389,120.929 96.251,120.929 RPI_GPIO*1.25@97.48,119.7 98.709,120.929 114.031,120.929 RPI_GPIO*1.39@115.26,119.7
NetP6_10: P6.10 RPI_GPIO*1.10 | length 9.4
  Top Layer w0.42: P6.10@77.16,113.8 77.16,116.159 75.946,117.373 75.946,121.026 RPI_GPIO*1.10@77.16,122.24
NetP6_11: P6.11 RPI_GPIO*1.11 | length 9.5
  Top Layer w0.42: P6.11@79.7,111.26 80.924,112.484 80.924,116.124 79.7,117.348 RPI_GPIO*1.11@79.7,119.7
NetP6_12: P6.12 RPI_GPIO*1.12 | length 9.4
  Top Layer w0.42: P6.12@79.7,113.8 79.7,116.159 78.486,117.373 78.486,121.026 RPI_GPIO*1.12@79.7,122.24
NetP6_13: P6.13 RPI_GPIO*1.13 | length 9.5
  Top Layer w0.42: P6.13@82.24,111.26 83.464,112.484 83.464,116.124 82.24,117.348 RPI_GPIO*1.13@82.24,119.7
NetP6_15: P6.15 RPI_GPIO*1.15 | length 9.5
  Top Layer w0.42: P6.15@84.78,111.26 86.004,112.484 86.004,116.124 84.78,117.348 RPI_GPIO*1.15@84.78,119.7
NetP6_16: P6.16 RPI_GPIO*1.16 | length 9.4
  Top Layer w0.42: P6.16@84.78,113.8 84.78,116.159 83.566,117.373 83.566,121.026 RPI_GPIO*1.16@84.78,122.24
NetP6_18: P6.18 RPI_GPIO*1.18 | length 9.4
  Top Layer w0.42: P6.18@87.32,113.8 87.32,116.159 86.106,117.373 86.106,121.026 RPI_GPIO*1.18@87.32,122.24
NetP6_19: P6.19 RPI_GPIO*1.19 | length 9.5
  Top Layer w0.42: P6.19@89.86,111.26 91.084,112.484 91.084,116.124 89.86,117.348 RPI_GPIO*1.19@89.86,119.7
NetP6_21: P6.21 RPI_GPIO*1.21 | length 9.5
  Top Layer w0.42: P6.21@92.4,111.26 93.624,112.484 93.624,116.124 92.4,117.348 RPI_GPIO*1.21@92.4,119.7
NetP6_22: P6.22 RPI_GPIO*1.22 | length 9.4
  Top Layer w0.42: P6.22@92.4,113.8 92.4,116.159 91.186,117.373 91.186,121.026 RPI_GPIO*1.22@92.4,122.24
NetP6_23: P6.23 RPI_GPIO*1.23 | length 9.5
  Top Layer w0.42: P6.23@94.94,111.26 96.164,112.484 96.164,116.124 94.94,117.348 RPI_GPIO*1.23@94.94,119.7
NetP6_24: P6.24 RPI_GPIO*1.24 | length 9.4
  Top Layer w0.42: P6.24@94.94,113.8 94.94,116.159 93.726,117.373 93.726,121.026 RPI_GPIO*1.24@94.94,122.24
NetP6_26: P6.26 RPI_GPIO*1.26 | length 9.4
  Top Layer w0.42: P6.26@97.48,113.8 97.48,116.159 96.266,117.373 96.266,121.026 RPI_GPIO*1.26@97.48,122.24
NetP6_27: P6.27 RPI_GPIO*1.27 | length 9.5
  Top Layer w0.42: P6.27@100.02,111.26 101.244,112.484 101.244,116.124 100.02,117.348 RPI_GPIO*1.27@100.02,119.7
NetP6_28: P6.28 RPI_GPIO*1.28 | length 9.4
  Top Layer w0.42: P6.28@100.02,113.8 100.02,116.159 98.806,117.373 98.806,121.026 RPI_GPIO*1.28@100.02,122.24
NetP6_29: P6.29 RPI_GPIO*1.29 | length 9.5
  Top Layer w0.42: P6.29@102.56,111.26 103.784,112.484 103.784,116.124 102.56,117.348 RPI_GPIO*1.29@102.56,119.7
NetP6_30: P6.30 RPI_GPIO*1.30 | length 9.4
  Top Layer w0.42: P6.30@102.56,113.8 102.56,116.159 101.346,117.373 101.346,121.026 RPI_GPIO*1.30@102.56,122.24
NetP6_31: P6.31 RPI_GPIO*1.31 | length 9.5
  Top Layer w0.42: P6.31@105.1,111.26 106.324,112.484 106.324,116.124 105.1,117.348 RPI_GPIO*1.31@105.1,119.7
NetP6_32: P6.32 RPI_GPIO*1.32 | length 9.4
  Top Layer w0.42: P6.32@105.1,113.8 105.1,116.159 103.886,117.373 103.886,121.026 RPI_GPIO*1.32@105.1,122.24
NetP6_33: P6.33 RPI_GPIO*1.33 | length 9.5
  Top Layer w0.42: P6.33@107.64,111.26 108.864,112.484 108.864,116.124 107.64,117.348 RPI_GPIO*1.33@107.64,119.7
NetP6_35: P6.35 RPI_GPIO*1.35 | length 9.5
  Top Layer w0.42: P6.35@110.18,111.26 111.404,112.484 111.404,116.124 110.18,117.348 RPI_GPIO*1.35@110.18,119.7
NetP6_36: P6.36 RPI_GPIO*1.36 | length 9.4
  Top Layer w0.42: P6.36@110.18,113.8 110.18,116.159 108.966,117.373 108.966,121.026 RPI_GPIO*1.36@110.18,122.24
NetP6_37: P6.37 RPI_GPIO*1.37 | length 9.5
  Top Layer w0.42: P6.37@112.72,111.26 113.944,112.484 113.944,116.124 112.72,117.348 RPI_GPIO*1.37@112.72,119.7
NetP6_38: P6.38 RPI_GPIO*1.38 | length 9.4
  Top Layer w0.42: P6.38@112.72,113.8 112.72,116.159 111.506,117.373 111.506,121.026 RPI_GPIO*1.38@112.72,122.24
NetP6_40: P6.40 RPI_GPIO*1.40 | length 9.4
  Top Layer w0.42: P6.40@115.26,113.8 115.26,116.159 114.046,117.373 114.046,121.026 RPI_GPIO*1.40@115.26,122.24
SCL: 9DOF.4 D4.2 Nano_Cur1.A5 Nano_ESC.A5 Nano_sens.A5 Nano_servos.A5 P6.5 P8.7 P13.7 P15.7 Pressure.2 RPI_GPIO*1.5 | length 264.1
  Top Layer w0.42: D4.2@48.4,110.77 48.4,95.821 51.511,92.71 51.511,89.909 9DOF.4@54.7,86.72 ; v1(64.491,81.686) 64.326,81.522 64.326,77.939 68.58,73.685 68.58,71.704 70.087,70.197 70.087,51.487 Nano_ESC.A5@68.73,50.13 ; P6.5@72.08,111.26 73.304,112.484 73.304,116.124 72.08,117.348 RPI_GPIO*1.5@72.08,119.7 ; P15.7@97.4,50.22 98.908,51.728 98.908,72.415 103.022,76.53 103.022,84.122 104.165,85.265 ; Nano_Cur1.A5@105.18,89.26 105.18,87.777 105.2,87.757 P8.7@105.2,86.3 104.165,85.265 ; Nano_sens.A5@118.73,50.13 106.299,62.561 106.299,69.621 104.165,71.755 104.165,85.265
  Bottom Layer w0.42: D4.2@48.4,110.77 50.001,109.169 57.468,109.169 58.014,108.623 58.014,107.467 58.42,107.061 63.221,107.061 63.754,107.594 65.938,107.594 67.386,109.042 69.862,109.042 P6.5@72.08,111.26 75.822,107.518 80.356,107.172 80.356,102.612 80.962,102.006 92.434,102.006 Nano_Cur1.A5@105.18,89.26 ; 9DOF.4@54.7,86.72 59.078,82.342 63.835,82.342 ; v1(64.491,81.686) 63.835,82.342 ; Pressure.2@79.7,80.4 78.486,79.186 75.946,79.186 72.789,82.342 63.835,82.342 ; Nano_servos.A5@92.73,50.13 94.996,50.13 95.086,50.22 P15.7@97.4,50.22 ; Nano_sens.A5@118.73,50.13 120.345,50.13 120.375,50.16 P13.7@122,50.16
SDA: 9DOF.5 D2.2 Nano_Cur1.A4 Nano_ESC.A4 Nano_sens.A4 Nano_servos.A4 P6.3 P8.8 P13.8 P15.8 Pressure.1 RPI_GPIO*1.3 | length 309.3
  Top Layer w0.42: D2.2@52.2,110.87 52.2,91.76 9DOF.5@54.7,89.26 ; RPI_GPIO*1.3@69.54,119.7 69.54,117.348 70.764,116.124 70.764,113.157 69.54,111.933 P6.3@69.54,111.26 69.54,109.696 70.841,108.395 70.841,103.886 77.16,97.567 Pressure.1@77.16,80.4 ; v1(97.384,99.009) 102.64,93.753 Nano_Cur1.A4@102.64,89.26 102.64,87.777 102.66,87.757 P8.8@102.66,86.3 99.289,82.929 99.289,75.336 97.307,73.355 97.307,67.742 96.164,66.599 96.164,48.916 P15.8@97.4,47.68 98.628,48.908 98.628,50.241 99.746,51.359 101.333,51.359 101.727,51.752 101.727,68.986 102.235,69.494 104.457,69.494 105.004,68.948 105.004,61.316 Nano_sens.A4@118.73,47.59
  Bottom Layer w0.42: 9DOF.5@54.7,89.26 60.944,83.016 74.544,83.016 Pressure.1@77.16,80.4 ; Nano_ESC.A4@68.73,47.59 72.263,51.123 72.263,66.358 73.736,67.831 75.149,67.831 76.517,69.2 78.422,69.2 78.843,68.779 78.843,55.031 86.284,47.59 Nano_servos.A4@92.73,47.59 94.996,47.59 95.086,47.68 P15.8@97.4,47.68 ; P6.3@69.54,111.26 70.802,112.522 75.565,112.522 75.946,112.141 75.946,108.902 76.391,108.458 80.95,108.458 81.03,108.377 81.03,103.505 81.411,103.124 93.269,103.124 v1(97.384,99.009) ; Nano_sens.A4@118.73,47.59 120.345,47.59 120.375,47.62 P13.8@122,47.62
VCC: 9DOF.1 Light.1 Nano_servos.5V P15.4 Water.1 | length 125.8
  Top Layer w0.42: Water.1@72.06,105.1 78.486,98.674 78.486,82.295 79.165,81.616 85.509,81.616 86.004,81.121 86.004,77.064 85.42,76.479 ; v1(81.331,77.013) 82.55,78.232 85.09,78.232 85.42,77.902 85.42,76.479 ; Nano_servos.5V@92.73,57.75 89.84,60.64 ; 81.661,70.76 81.661,70.117 82.233,69.545 82.875,69.545 ; 81.661,70.76 81.661,73.343 82.105,73.787 82.728,73.787 84.76,75.819 ; 81.661,70.76 81.478,70.942 81.478,73.312 83.986,75.819 84.76,75.819 ; 81.661,70.76 82.875,69.545 ; 82.875,69.545 89.484,69.545 ; 84.76,75.819 85.09,75.819 85.42,76.149 85.42,76.479 ; 84.76,75.819 85.42,76.479 ; 89.484,69.545 89.814,69.215 89.814,60.666 89.84,60.64 ; 89.484,69.545 89.51,69.545 89.84,69.215 89.84,60.64
  Bottom Layer w0.42: 9DOF.1@54.7,79.1 55.6,80 Light.1@58.56,80 61.192,77.368 70.891,77.368 71.247,77.013 v1(81.331,77.013) ; Nano_servos.5V@92.73,57.75 94.996,57.75 95.086,57.84 P15.4@97.4,57.84
pads on no net: 9DOF.2 9DOF.6 9DOF.7 9DOF.8 9DOF.9 9DOF.10 Nano_Cur1.1 Nano_Cur1.5V. Nano_Cur1.<USB>+V Nano_Cur1.<USB>D+ Nano_Cur1.<USB>D- Nano_Cur1.<USB>GND Nano_Cur1.<USB>ID Nano_Cur1.GND_ Nano_Cur1.MISO Nano_Cur1.MOSI Nano_Cur1.RESET.. Nano_Cur1.SCK Nano_ESC.1 Nano_ESC.3V3 Nano_ESC.5V Nano_ESC.5V. Nano_ESC.<USB>+V Nano_ESC.<USB>D+ Nano_ESC.<USB>D- Nano_ESC.<USB>GND Nano_ESC.<USB>ID Nano_ESC.A0 Nano_ESC.A1 Nano_ESC.A2 Nano_ESC.A3 Nano_ESC.A6 Nano_ESC.A7 Nano_ESC.D7 Nano_ESC.D8 Nano_ESC.D12 Nano_ESC.GND Nano_ESC.GND. Nano_ESC.GND_ Nano_ESC.MISO Nano_ESC.MOSI Nano_ESC.REF Nano_ESC.RESET.. Nano_ESC.RST Nano_ESC.RST. Nano_ESC.RX1 Nano_ESC.SCK Nano_ESC.TX1 Nano_sens.1 Nano_sens.5V. Nano_sens.<USB>+V Nano_sens.<USB>D+ Nano_sens.<USB>D- Nano_sens.<USB>GND Nano_sens.<USB>ID Nano_sens.GND_ Nano_sens.MISO Nano_sens.MOSI Nano_sens.RESET.. Nano_sens.SCK Nano_servos.1 Nano_servos.5V. Nano_servos.<USB>+V Nano_servos.<USB>D+ Nano_servos.<USB>D- Nano_servos.<USB>GND Nano_servos.<USB>ID Nano_servos.GND_ Nano_servos.MISO Nano_servos.MOSI Nano_servos.RESET.. Nano_servos.SCK P2.3 P2.4 P3.3 P3.4 P4.3 P4.4 P5.3 P5.4

## Polygon pours and split planes (outlines as drawn)
GND on Top Layer "Top Layer GND" (solid, pour order 0): 25,25 25,125 125,125 125,25
12V on Bottom Layer "Bot Layer - 12V" (solid, pour order 1): 25,25 25,125 125,125 125,25

## Keep-outs
Keep-Out Layer:
  lines w0.2: 25.4,25.5 124.5,25.5 124.5,124.5 25.4,124.5 25.4,99.6 25.4,49.6 25.4,25.5

## Other copper
Bottom Layer:
  rectangle net 12V: 32,100.1 36.6,103.2
  rectangle net 12V: 31.9,90.1 36.5,93
  rectangle net 12V: 32,80.2 36.6,83
  rectangle net 12V: 33.8,65 36.6,68.9
  rectangle net 12V: 47,90.1 50.9,93
  rectangle net 12V: 47,80.2 51.1,83.3

## Silkscreen, mask and mechanical layers (free items; w line width, h text height)
Top Overlay:
  circle w0.254: c118.5,57.5 r0.283
Bottom Overlay:
  text "UROV AuxBoard V2.0  / OSURC 17-18 / Jorian Bruslind" at 116.98,95.401 h1.52
Mechanical 8:
  text "SDA" at 56.4,89 h0.5
  text "SCL" at 51.4,86.4 h0.5
  text "GND" at 51.4,84 h0.5
  text "VCC" at 51.4,78.8 h0.5
  text "3_3V" at 81.3,78.2 h0.5
  text "GND" at 84.2,78.2 h0.5
  text "SDA" at 76.3,78.1 h0.5
  text "SCL" at 78.9,78.1 h0.5

## Text inside footprints (layer, text, board x,y; h text height)
Cur_1: Top Overlay "-" at 30.7,26.1 h1.52 r180; Top Overlay "+" at 35.7,26.1 h1.52 r180
Cur_2: Top Overlay "-" at 42.7,26.1 h1.52 r180; Top Overlay "+" at 47.7,26.1 h1.52 r180
Cur_3: Top Overlay "-" at 30.7,36.1 h1.52 r180; Top Overlay "+" at 35.7,36.1 h1.52 r180
Cur_4: Top Overlay "-" at 42.7,36.1 h1.52 r180; Top Overlay "+" at 47.7,36.1 h1.52 r180
Cur_5: Top Overlay "-" at 30.7,46.1 h1.52 r180; Top Overlay "+" at 35.7,46.1 h1.52 r180
Cur_6: Top Overlay "-" at 42.7,46.1 h1.52 r180; Top Overlay "+" at 47.7,46.1 h1.52 r180
Cur_7: Top Overlay "-" at 30.5,55 h1.52 r180; Top Overlay "+" at 35.5,55 h1.52 r180
P1: Top Overlay "22" at 61.492,86.436 h1.27 r270; Top Overlay "21" at 58.952,86.436 h1.27 r270; Top Overlay "2" at 61.492,115.9 h1.27 r270; Top Overlay "1" at 58.952,115.9 h1.27 r270
P2: Top Overlay "6" at 98.568,83.164 h1.27 r90; Top Overlay "5" at 101.108,83.164 h1.27 r90; Top Overlay "2" at 98.568,74.02 h1.27 r90; Top Overlay "1" at 101.108,74.528 h1.27 r90
P3: Top Overlay "6" at 105.908,83.124 h1.27 r90; Top Overlay "5" at 108.448,83.124 h1.27 r90; Top Overlay "2" at 105.908,73.98 h1.27 r90; Top Overlay "1" at 108.448,74.488 h1.27 r90
P4: Top Overlay "6" at 113.308,83.124 h1.27 r90; Top Overlay "5" at 115.848,83.124 h1.27 r90; Top Overlay "2" at 113.308,73.98 h1.27 r90; Top Overlay "1" at 115.848,74.488 h1.27 r90
P5: Top Overlay "6" at 91.068,83.264 h1.27 r90; Top Overlay "5" at 93.608,83.264 h1.27 r90; Top Overlay "2" at 91.068,74.12 h1.27 r90; Top Overlay "1" at 93.608,74.628 h1.27 r90
P6: Top Overlay "39" at 117.292,110.752 h1.27; Top Overlay "40" at 117.292,113.292 h1.27; Top Overlay "2" at 64.46,113.292 h1.27; Top Overlay "1" at 64.46,110.752 h1.27
POWER: Top Overlay "-" at 31,115.1 h1.52 r180; Top Overlay "+" at 36,115.1 h1.52 r180
RPI_GPIO*1: Top Overlay "39" at 117.292,119.192 h1.27; Top Overlay "40" at 117.292,121.732 h1.27; Top Overlay "2" at 64.46,121.732 h1.27; Top Overlay "1" at 64.46,119.192 h1.27